# Allegro board CIRCLELED.brd
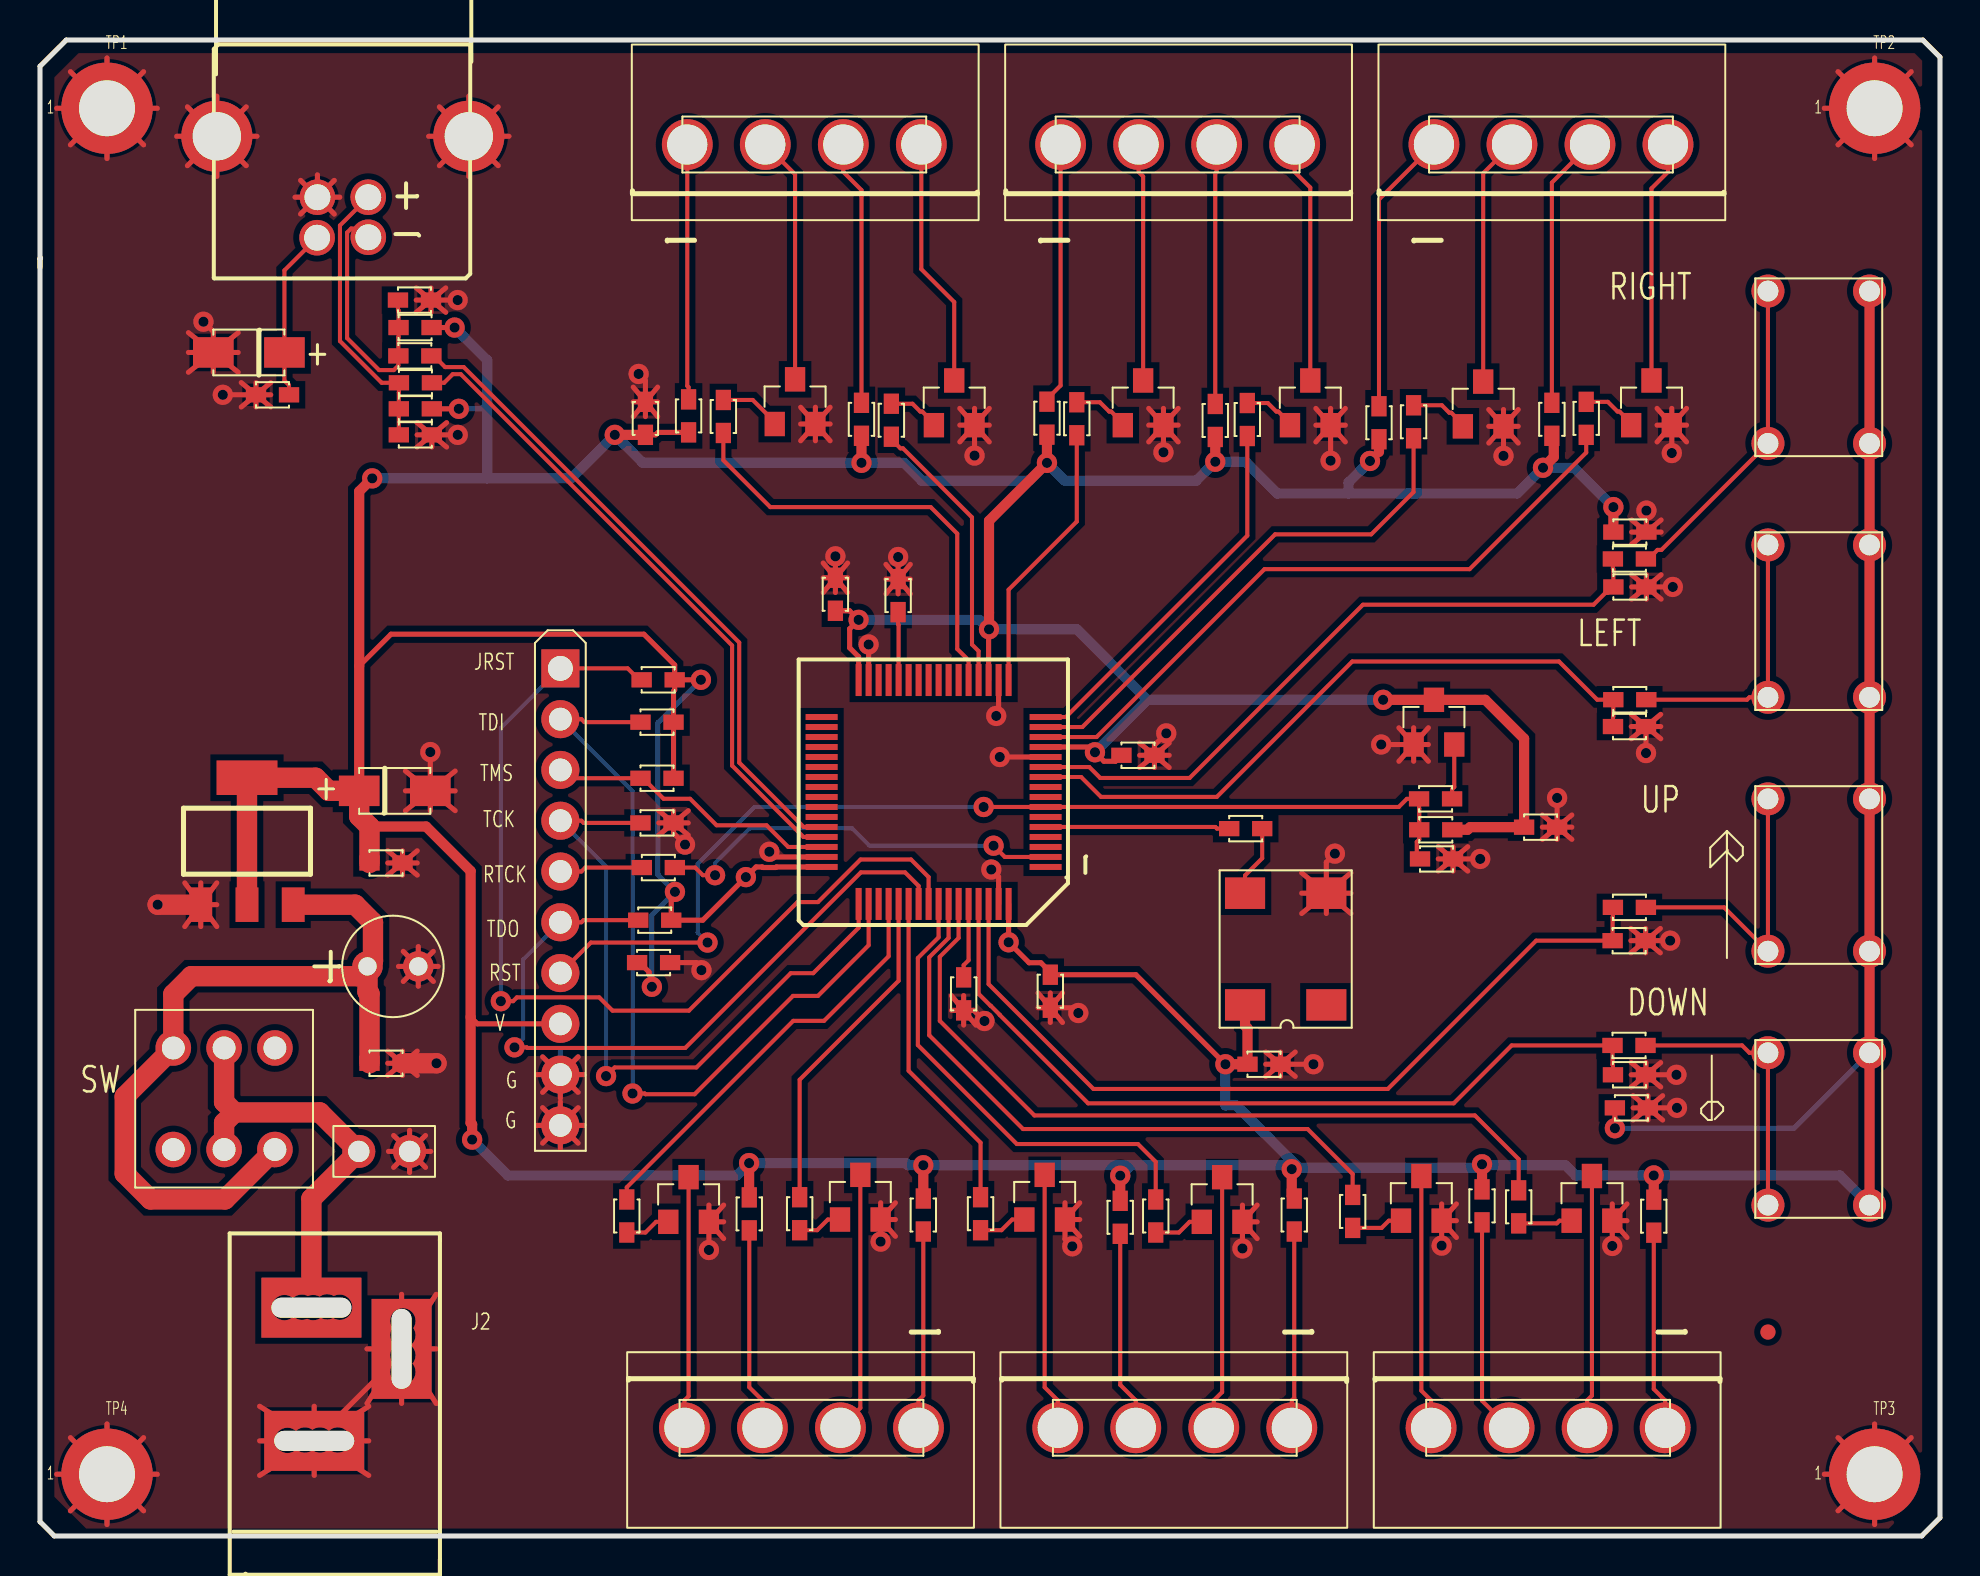
[diagram p0: board, top side]
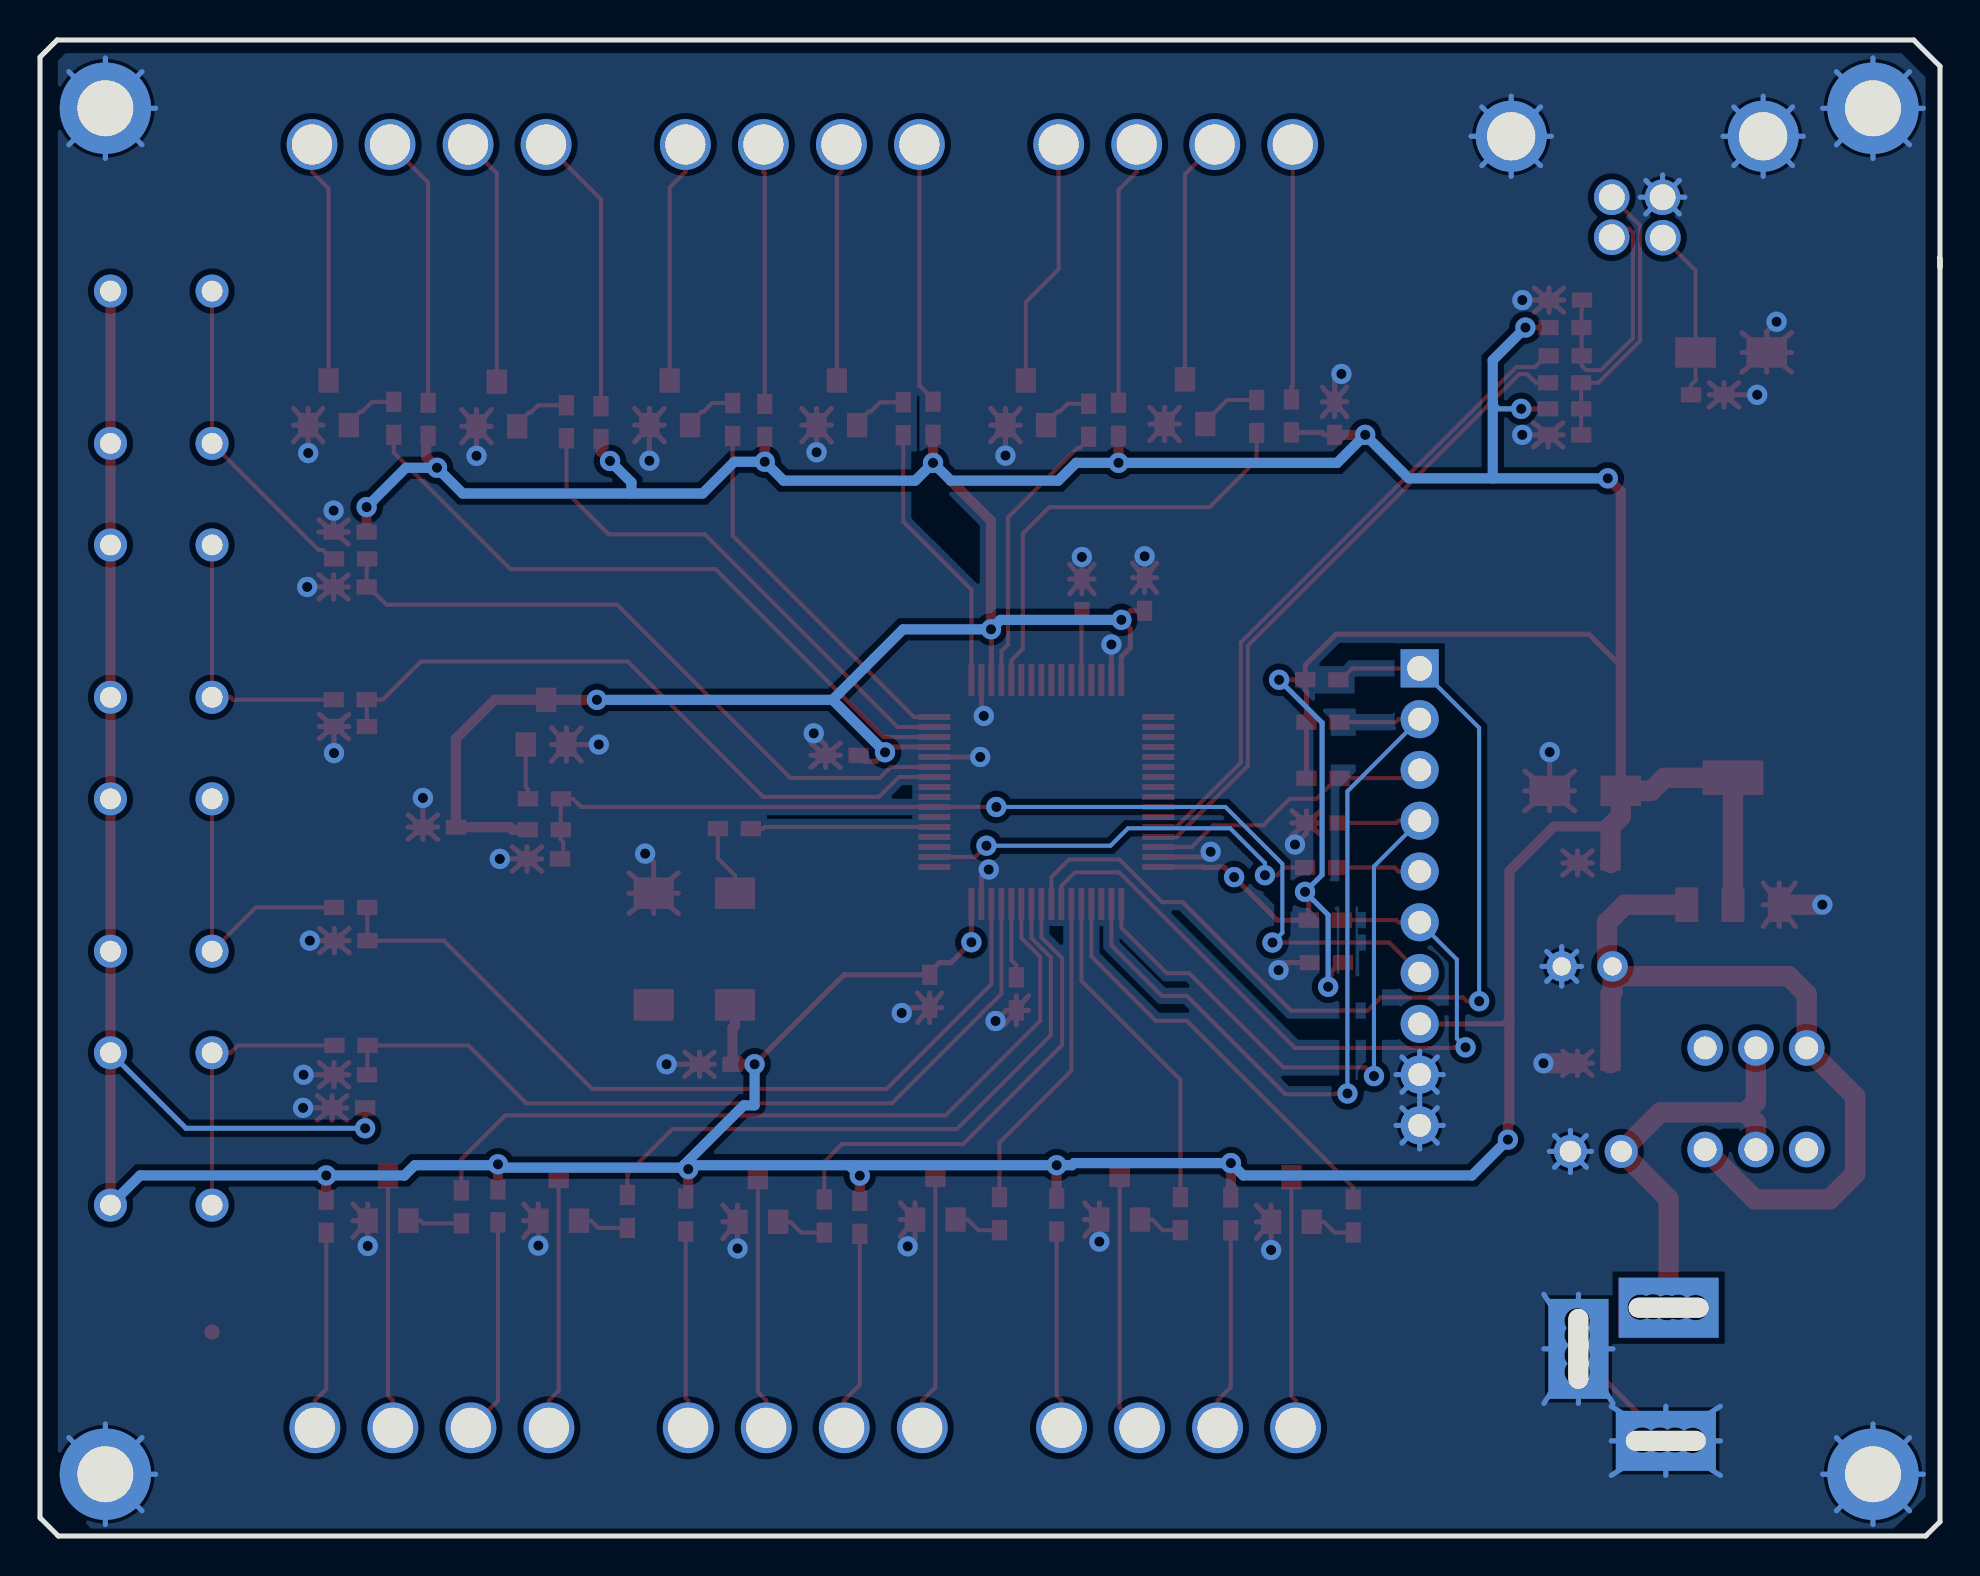
[diagram p1: board, bottom side, seen from below]

Outline 95.01 x 74.83 mm; copper layers: TOP, BOTTOM. Coordinates in mm from the lower left corner of the outline.
Outline path: 0.03,63.92 0,63.9 0,0.72 0.72,0 94.1,0 95.01,0.92 95.01,73.97 94.15,74.83 1.32,74.83 0,73.51 0,63.44

## Design rules (mm)
nets with their own width: min track width 0.254; nets GND VCC3_3

## Placement (name value [footprint] x y rotation side)
C1  47uF/25V  [CAP2]  14.19 27.31 270 top
C2  0.1uF  [0603]  16.48 23.65 0 top
C3  22uF  [CT1206]  15.96 37.27 0 top
C4  0.1uF  [0603]  16.48 33.67 0 top
C5  0.1uF  [0603]  74.21 35.46 0 top
C6  22uF/16v  [CT1206]  12.22 59.2 180 top
C7  100n  [0603]  69.01 33.87 0 top
C8  0.1uF  [0603]  12.45 57.08 180 top
C9  0.1uF  [0603]  50.52 28.08 270 top
C10  0.1uF  [0603]  60.38 23.6 0 top
C11  0.1uF  [0603]  39.78 46.28 90 top
C12  0.1uF  [0603]  54.08 39.05 0 top
C13  0.1uF  [0603]  30.28 55.08 90 top
C14  0.1uF  [0603]  78.68 50.22 0 top
C15  0.1uF  [0603]  78.76 21.42 0 top
C16  0.1uF  [0603]  29.86 28.68 0 top
D1  12V  [CAPCK05]  18.48 19.24 90 top
D2  NC/ESD  [0603]  19.6 55.08 180 top
D3  NC/ESD  [0603]  19.55 61.82 180 top
J1  CON10  [SIP-10]  26.02 43.4 0 top
J2  PWR/12v@1.0A  [POWER]  14.34 10.42 180 top
J3  PWRKEY  [POWERKEY]  9.21 21.87 90 top
J4  KEY  [KEY4]  88.95 45.76 180 top
J5  KEY  [KEY4]  88.95 33.06 180 top
J6  KEY  [KEY4]  88.95 20.36 180 top
J7  KEY  [KEY4]  88.95 58.46 180 top
J8  CON6  [USB_B]  15.14 66.01 0 top
J9  CON4  [PWCON_4]  38.15 69.89 90 top
J10  CON4  [PWCON_4]  56.82 69.89 90 top
J11  CON4  [PWCON_4]  75.49 69.89 90 top
J12  CON4  [PWCON_4]  38.15 5.12 270 top
J13  CON4  [PWCON_4]  56.82 5.12 270 top
J14  CON4  [PWCON_4]  75.49 5.12 270 top
LR1  HOLE  [PCIR]  86.41 10.2 0 top
Q1  S9014LTI  [SOT-23]  37.76 56.74 0 top
Q2  S9014LTI  [SOT-23]  55.16 56.68 0 top
Q3  S9014LTI  [SOT-23]  45.72 56.68 0 top
Q4  S9014LTI  [SOT-23]  63.52 56.68 0 top
Q5  S9014LTI  [SOT-23]  72.17 56.62 0 top
Q6  S9014LTI  [SOT-23]  41.02 16.95 0 top
Q7  S9014LTI  [SOT-23]  32.43 16.83 0 top
Q8  S9014LTI  [SOT-23]  80.59 56.68 0 top
Q9  S9014LTI  [SOT-23]  59.11 16.83 0 top
Q10  S9014LTI  [SOT-23]  77.61 16.89 0 top
Q11  S9014LTI  [SOT-23]  50.24 16.95 0 top
Q12  S9014LTI  [SOT-23]  69.08 16.89 0 top
R1  10k  [0603]  30.09 42.83 0 top
R2  10k  [0603]  30.03 37.9 0 top
R3  10k  [0603]  30.03 35.67 0 top
R4  10k  [0603]  30.03 40.71 0 top
R5  10k  [0603]  29.92 30.8 0 top
R6  0  [0603]  46.19 27.94 270 top
R7  NC  [0603]  42.91 47.86 270 top
R8  100  [0603]  80.33 41.83 180 top
R9  100  [0603]  80.31 31.44 180 top
R10  1K  [0603]  78.64 29.78 0 top
R11  1K  [0603]  78.66 40.49 0 top
R12  0  [0603]  31.75 33.44 180 top
R13  100  [0603]  80.31 48.87 180 top
R14  100  [0603]  80.29 24.54 180 top
R15  1K  [0603]  78.66 23.07 0 top
R16  1K  [0603]  78.68 47.47 0 top
R17  1.5K  [0603]  19.6 56.38 180 top
R18  1.5K  [0603]  19.58 60.45 180 top
R19  10k  [0603]  70.62 35.33 180 top
R20  5.1  [0603]  17.92 59.03 0 top
R21  10  [0603]  61.12 35.38 180 top
R22  5.1  [0603]  17.95 57.68 0 top
R23  10  [0603]  68.96 36.87 0 top
R24  100  [0603]  32.43 56.85 270 top
R25  100  [0603]  34.17 55.17 90 top
R26  100  [0603]  50.36 56.74 270 top
R27  100  [0603]  41.08 56.68 270 top
R28  100  [0603]  51.85 55.06 90 top
R29  100  [0603]  58.77 56.62 270 top
R30  100  [0603]  42.58 54.98 90 top
R31  100  [0603]  60.37 55.02 90 top
R32  100  [0603]  68.69 54.91 90 top
R33  100  [0603]  66.96 56.51 270 top
R34  100  [0603]  37.99 16.95 270 top
R35  100  [0603]  44.17 15.23 90 top
R36  100  [0603]  75.6 56.68 270 top
R37  100  [0603]  35.47 15.29 90 top
R38  100  [0603]  29.34 16.83 270 top
R39  100  [0603]  77.32 55.08 90 top
R40  100  [0603]  55.79 16.83 270 top
R41  100  [0603]  73.94 17.29 270 top
R42  100  [0603]  62.72 15.23 90 top
R43  100  [0603]  54.02 15.12 90 top
R44  100  [0603]  80.7 15.17 90 top
R45  100  [0603]  72.11 15.69 90 top
R46  100  [0603]  47.03 16.95 270 top
R47  100  [0603]  65.64 17.06 270 top
TP1  via  [VIA_2_5MM]  3.35 71.42 0 top
TP2  via  [VIA_2_5MM]  91.74 71.42 0 top
TP3  via  [VIA_2_5MM]  91.74 3.09 0 top
TP4  via  [VIA_2_5MM]  3.35 3.09 0 top
U1  STM32F103RFT  [LQFP64Z]  44.69 37.22 180 top
U2  AMS1117-3.3  [SOT223]  10.35 34.75 0 top
U3  MAX809_EUR-T  [SOT-23]  69.71 40.71 0 top
Y1  11.0592MHz  [OSC_SMD]  64.32 26.57 90 top

## Library data of the parts
C1 = CAPACITOR POL: User Part Number: ***; Tolerance: ***
C2 C4 C5 C7-C16 = CAP NP
C3 = CAPACITOR POL
C6 = CAP POL
D1 = DIODE BI-DIR TRIG: Tolerance: ***; User Part Number: ***
D2 D3 = BAV99_0
J1 = CON10: User Part Number: ***
J2 = HEADER 3_1
J3 = HEADER 6
J4-J7 = HEADER 4
J8 = CON6
J9-J14 = CON4
LR1 = HOLE
Q1-Q12 = 1R1001_0
R1-R47 = R
TP1-TP4 = via
U1 = STM32F107_1
U2 = LM117HV/TO3_3
U3 = MAX809_EUR-T
Y1 = Osc

## Footprints (pads in the part's own frame, mm; a bottom-side part is the same pattern mirrored in y, then rotated)
0603
  rect 1.016x0.762 smd: 1(0,0) 2(1.651,0)
CAP2
  round 1.524 hole 0.914: 1(-1.181,2.19) 2(-1.181,4.73)
CAPCK05
  round 1.651 hole 1.067: 1(0,0) 2(0,2.54)
CT1206
  rect 2.032x1.524 smd: 1(0,0) 2(3.556,0)
KEY4
  round 1.651 hole 1.041: 1(-2.54,3.81) 2(-2.54,-3.81) 3(2.54,-3.81) 4(2.54,3.81)
LQFP64Z
  rect 1.6x0.3 smd: 1(-5.6,3.75) 2(-5.6,3.25) 3(-5.6,2.75) 4(-5.6,2.25) 5(-5.6,1.75) 6(-5.6,1.25) 7(-5.6,0.75) 8(-5.6,0.25) 9(-5.6,-0.25) 10(-5.6,-0.75) 11(-5.6,-1.25) 12(-5.6,-1.75) 13(-5.6,-2.25) 14(-5.6,-2.75) 15(-5.6,-3.25) 16(-5.6,-3.75) 33(5.6,-3.75) 34(5.6,-3.25) 35(5.6,-2.75) 36(5.6,-2.25) 37(5.6,-1.75) 38(5.6,-1.25) 39(5.6,-0.75) 40(5.6,-0.25) 41(5.6,0.25) 42(5.6,0.75) 43(5.6,1.25) 44(5.6,1.75) 45(5.6,2.25) 46(5.6,2.75) 47(5.6,3.25) 48(5.6,3.75)
  rect 0.3x1.6 smd: 17(-3.75,-5.6) 18(-3.25,-5.6) 19(-2.75,-5.6) 20(-2.25,-5.6) 21(-1.75,-5.6) 22(-1.25,-5.6) 23(-0.75,-5.6) 24(-0.25,-5.6) 25(0.25,-5.6) 26(0.75,-5.6) 27(1.25,-5.6) 28(1.75,-5.6) 29(2.25,-5.6) 30(2.75,-5.6) 31(3.25,-5.6) 32(3.75,-5.6) 49(3.75,5.6) 50(3.25,5.6) 51(2.75,5.6) 52(2.25,5.6) 53(1.75,5.6) 54(1.25,5.6) 55(0.75,5.6) 56(0.25,5.6) 57(-0.25,5.6) 58(-0.75,5.6) 59(-1.25,5.6) 60(-1.75,5.6) 61(-2.25,5.6) 62(-2.75,5.6) 63(-3.25,5.6) 64(-3.75,5.6)
OSC_SMD
  rect 1.575x2.007 smd: 1(0,0) 7(5.588,0) 8(5.588,4.064) 14(0,4.064)
PCIR
  round 0.762 smd: 1(0,0)
POWER
  rect 5x3 hole 4x1: 1(0.77,-1) 2(0.63,5.66)
  rect 3x5 hole 1x4: 3(-3.74,1.06)
POWERKEY
  round 1.778 hole 1.143: 1(-2.54,2.54) 2(-2.54,0) 3(-2.54,-2.54) 4(2.54,-2.54) 5(2.54,0) 6(2.54,2.54)
PWCON_4
  round 2.54 hole 2.007: 1(-0.29,5.781) 2(-0.29,1.88) 3(-0.29,-2.022) 4(-0.29,-5.923)
SIP-10
  rect 1.905x1.905 hole 1.245: 1(0,0)
  round 1.905 hole 1.143: 2(0,-2.54) 3(0,-5.08) 4(0,-7.62) 5(0,-10.16) 6(0,-12.7) 7(0,-15.24) 8(0,-17.78) 9(0,-20.32) 10(0,-22.86)
SOT223
  rect 1.143x1.727 smd: 1(-2.311,-3.175) 2(0,-3.175) 3(2.311,-3.175)
  rect 3.048x1.727 smd: 4(0,3.175)
SOT-23
  rect 1.016x1.219 smd: 1(-1.016,-1.118) 2(1.016,-1.118) 3(0,1.118)
USB_B
  round 1.778 hole 1.295: 1(-1.286,-1.074) 2(1.274,-1.051) 3(1.27,0.952) 4(-1.27,0.952)
  round 3.556 hole 2.413: 5(-6.3,4) 6(6.3,4)
VIA_2_5MM
  round 4.572 hole 2.794: 1(0,0)

## Nets
GND: C1.2 C2.2 C3.2 C4.2 C5.2 C6.2 C7.2 C8.2 C9.2 C10.2 C11.2 C12.2 C13.2 C14.2 C15.2 C16.2 D1.1 D2.1 D3.1 J1.9 J1.10 J2.2 J2.3 J8.4 J8.5 J8.6 Q1.2(E) Q2.2(E) Q3.2(E) Q4.2(E) Q5.2(E) Q6.2(E) Q7.2(E) Q8.2(E) Q9.2(E) Q10.2(E) Q11.2(E) Q12.2(E) R3.2 R6.2 R7.1 R10.2 R11.2 R15.2 R16.2 TP1.1(VIA) TP2.1(VIA) TP3.1(VIA) TP4.1(VIA) U1.12(VSSA) U1.18(VSS4) U1.31(VSS1) U1.47(VSS2) U1.63(VSS3) U2.1(ADJ) U3.1(GND) Y1.7(GND)
VCC3_3: C3.1 C4.1 C5.1 C9.1 C10.1 C11.1 C12.1 C13.1 C14.1 C15.1 C16.1 J1.8 J4.1 J4.2 J5.1 J5.2 J6.1 J6.2 J7.1 J7.2 R1.2 R2.2 R4.2 R5.2 R17.1 R18.1 R19.1 R24.2 R26.2 R27.2 R29.2 R33.2 R35.2 R36.2 R37.2 R42.2 R43.2 R44.2 R45.2 U1.13(VDDA) U1.19(VDD4) U1.32(VDD1) U1.48(VDD2) U1.64(VDD3) U2.2(VOUT) U2.4(NC) U3.3(VCC) Y1.14(VCC)
VCC12V: D1.2 J2.1 J3.2 J3.5
VCC_VBUS: C6.1 C8.1 J8.1
VCCIN: C1.1 C2.1 J3.3 J3.6 U2.3(VIN)
ARM_RST_N: C7.1 J1.7 R19.2 R23.1 U1.7(NRST)
ARMCLKIN: R21.2 U1.5(OSC_IN/PD0)
D0: R25.1 U1.21(PA5/SPI1_SCK)
D1: R30.1 U1.20(PA4/SPI1_MSS)
D2: R28.1 U1.17(PA3/RX2)
D3: R31.1 U1.16(PA2/TX2)
D4: R32.1 U1.15(PA1)
D5: R39.1 U1.14(PA0-WKUP)
D6: R34.1 U1.53(PC12/TX5)
D7: R38.1 U1.52(PC11/RX4)
D8: R41.1 U1.59(PB7/SDA1)
D9: R47.1 U1.58(PB6/SCL1)
D10: R40.1 U1.57(PB5)
D11: R46.1 U1.54(PD2/RX5)
DOWN: R14.2 R15.1 U1.61(PB8)
DQ0: J9.2 Q1.3(C)
DQ1: J9.4 Q3.3(C)
DQ2: J10.2 Q2.3(C)
DQ3: J10.4 Q4.3(C)
DQ4: J11.2 Q5.3(C)
DQ5: J11.4 Q8.3(C)
DQ6: J12.2 Q6.3(C)
DQ7: J12.4 Q7.3(C)
DQ8: J14.2 Q10.3(C)
DQ9: J14.4 Q12.3(C)
DQ10: J13.2 Q9.3(C)
DQ11: J13.4 Q11.3(C)
JTAG_RST: J1.1 R1.1 U1.56(PB4/JTRSTN)
LEFT: R8.2 R11.1 U1.10(PC2)
RIGHT: R13.2 R16.1 U1.11(PC3)
RTCK: J1.5 R12.2
TCLK: J1.4 R3.1 U1.49(PA14/JTCK)
TDI: J1.2 R4.1 U1.50(PA15/JTDI)
TDO: J1.6 R5.1 U1.55(PB3/JTDO)
TMS: J1.3 R2.1 U1.46(PA13/JTMS)
UP: R9.2 R10.1 U1.62(PB9)
USB+: R22.2 U1.45(PA12/USB+)
USB-: R20.2 U1.44(PA11/USB-)
N01892: R7.2 U1.28(PB2/BOOT1)
N01962: R6.1 U1.60(BOOT0)
N02254: R21.1 Y1.8(OUT)
N03112: D3.2 J8.2 R18.2 R20.1
N03116: D2.2 J8.3 R17.2 R22.1
N07244: J9.1 R24.1
N07286: J9.3 R27.1
N09335: J10.1 R26.1
N09345: J10.3 R29.1
N10158: J11.1 R33.1
N10168: J11.3 R36.1
N10591: J12.1 R35.1
N10601: J12.3 R37.1
N10711: J14.1 R44.1
N10721: J14.3 R45.1
N10838: J13.1 R42.1
N10848: J13.3 R43.1
N15526: J5.3 J5.4 R9.1
N15732: J6.3 J6.4 R14.1
N16389: J4.3 J4.4 R8.1
N16471: J7.3 J7.4 R13.1
N018780: R12.1 U1.2(PC13/RTC)
N021801: R23.2 U3.2(/RST)
N069480: Q1.1(B) R25.2
N074280: Q3.1(B) R30.2
N092570: Q2.1(B) R28.2
N093950: Q4.1(B) R31.2
N095300: Q5.1(B) R32.2
N095980: Q8.1(B) R39.2
N097490: Q6.1(B) R34.2
N099610: Q7.1(B) R38.2
N100350: Q10.1(B) R41.2
N103300: Q12.1(B) R47.2
N104020: Q9.1(B) R40.2
N104740: Q11.1(B) R46.2

Pads without a net: J3 1 4; LR1 1; U1 1 3 4 6 8 9 22 23 24 25 26 27 29 30 33 34 35 36 37 38 39 40 41 42 43 51; Y1 1

## Via types
v1: diameter 1.016, hole 0.508, TOP to BOTTOM, 78 vias
v2: diameter 1.78, hole 1.27, TOP to BOTTOM, 13 vias

## Routing (per net, layer and track width the routed paths; a pad name or vN(x,y) marks a point on that pad's centre or on a via; arc(x,y) is an arc through that point)
GND: length 683.6
  TOP w0.254: 42.91,47.13 R7.1 ; R7.1 43.52,47.86 ; R7.1 42.3,47.86 ; R7.1 v1(42.91,48.97) ; R7.1 42.3,47.13 ; R7.1 43.52,48.6 ; R7.1 42.3,48.6 ; R7.1 43.52,47.13 ; 72.45,55.51 Q5.2 ; Q5.2 72.45,54.67 ; Q5.2 72.45,56.35 ; Q5.2 73.19,56.35 ; Q5.2 73.92,56.35 ; Q5.2 73.92,54.67 ; Q5.2 73.92,55.51 ; Q5.2 v1(73.19,54.03) ; Q4.2 65.28,55.56 ; Q4.2 65.28,54.73 ; Q4.2 63.8,54.73 ; Q4.2 63.8,55.56 ; Q4.2 63.8,56.4 ; Q4.2 65.28,56.4 ; Q4.2 64.54,56.4 ; Q4.2 v1(64.54,53.79) ; 18.27,36.28 C3.2 ; C3.2 18.27,37.27 ; C3.2 20.76,36.28 ; C3.2 19.52,36.28 ; C3.2 v1(19.52,39.21) ; C3.2 20.76,38.26 ; C3.2 18.27,38.26 ; C3.2 20.76,37.27 ; 17.39,33.67 C4.2 ; C4.2 18.13,34.28 ; C4.2 17.39,33.06 ; C4.2 18.87,33.67 ; C4.2 17.39,34.28 ; C4.2 18.87,34.28 ; C4.2 18.13,33.06 ; C4.2 18.87,33.06 ; C8.2 v1(9.14,57.08) ; C8.2 11.54,57.69 ; C8.2 11.54,56.47 ; C8.2 10.8,56.47 ; C8.2 11.54,57.08 ; C8.2 10.8,57.69 ; C8.2 10.07,56.47 ; C8.2 10.07,57.69 ; Y1.7 65.56,32.15 ; Y1.7 65.56,31.14 ; Y1.7 64.32,33.7 v1(64.75,34.13) ; Y1.7 63.09,31.14 ; Y1.7 63.09,33.17 ; Y1.7 63.09,32.15 ; Y1.7 64.32,31.14 ; Y1.7 65.56,33.17 ; C14.2 81.07,50.83 ; C14.2 v1(80.33,51.29) ; C14.2 81.07,50.22 ; C14.2 79.59,49.61 ; C14.2 79.59,50.22 ; C14.2 79.59,50.83 ; 79.56,29.78 R10.2 ; R10.2 80.29,29.17 ; R10.2 80.29,30.39 ; R10.2 79.56,29.17 ; R10.2 81.03,29.17 ; R10.2 79.56,30.39 ; R10.2 81.03,30.39 ; R10.2 v1(81.52,29.78) ; v2(18.15,10.04) 18.15,9.42 J2.3 ; Q3.2 47.47,56.4 ; Q3.2 46,54.73 ; Q3.2 46,56.4 ; Q3.2 46.73,56.4 ; Q3.2 47.47,54.73 ; Q3.2 v1(46.73,54.04) ; Q3.2 47.47,55.56 ; Q3.2 46,55.56 ; Q7.2 34.19,16.55 ; Q7.2 34.19,15.72 ; Q7.2 34.19,14.88 ; Q7.2 33.45,16.55 ; Q7.2 v1(33.45,14.31) ; 61.3,22.99 C10.2 ; C10.2 62.03,24.21 ; C10.2 62.77,22.99 ; C10.2 61.3,23.6 ; C10.2 61.3,24.21 ; C10.2 62.77,24.21 ; C10.2 v1(63.68,23.6) ; C10.2 62.03,22.99 ; 19.6,54.47 D2.1 ; D2.1 20.33,54.47 ; D2.1 v1(20.89,55.08) ; D2.1 20.33,55.69 ; D2.1 18.86,55.08 ; D2.1 18.86,55.69 ; D2.1 18.86,54.47 ; R15.2 80.31,23.68 ; R15.2 v1(81.83,23.07) ; R15.2 79.57,22.46 ; R15.2 79.57,23.68 ; R15.2 80.31,22.46 ; R15.2 81.05,23.68 ; R15.2 81.05,22.46 ; R15.2 79.57,23.07 ; 79.57,41.1 R11.2 ; R11.2 79.57,40.49 ; R11.2 79.57,39.88 ; R11.2 v1(80.31,39.16) ; R11.2 81.05,41.1 ; R11.2 81.05,39.88 ; R11.2 81.05,40.49 ; Q2.2 56.18,56.4 ; Q2.2 56.92,54.73 ; Q2.2 56.92,56.4 ; Q2.2 55.44,54.73 ; Q2.2 55.44,56.4 ; Q2.2 55.44,55.56 ; Q2.2 56.92,55.56 ; Q2.2 v1(56.18,54.21) ; J8.5 8.84,72.02 ; J8.5 10.31,68.54 ; J8.5 10.85,70.01 ; J8.5 10.31,71.48 ; J8.5 6.84,70.01 ; J8.5 7.37,68.54 ; J8.5 8.84,68.01 ; J8.5 7.37,71.48 ; C5.2 76.6,35.46 ; C5.2 76.6,34.85 ; C5.2 v1(75.87,36.92) ; C5.2 75.13,36.07 ; C5.2 75.13,35.46 ; C5.2 75.87,34.85 ; C5.2 75.13,34.85 ; C5.2 76.6,36.07 ; 19.44,70.01 J8.6 ; J8.6 21.44,72.02 ; J8.6 23.45,70.01 ; J8.6 22.91,68.54 ; J8.6 19.97,68.54 ; J8.6 22.91,71.48 ; J8.6 21.44,68.01 ; J8.6 19.97,71.48 ; 14.85,4.76 v2(14.89,4.8) v2(14,4.8) 13.75,4.8 ; 14.85,4.76 16.44,4.76 ; 14.85,4.76 J2.2 ; U3.1 68.69,40.43 ; U3.1 67.95,40.43 ; U3.1 68.69,38.75 ; U3.1 v1(67.07,39.59) ; U3.1 67.95,38.75 ; U3.1 69.43,38.75 ; U3.1 69.43,39.59 ; U3.1 69.43,40.43 ; v2(13.25,4.8) 13.67,4.8 13.69,4.78 ; 7.42,58.21 C6.2 ; C6.2 9.91,58.21 ; C6.2 7.42,59.2 ; C6.2 9.91,59.2 ; C6.2 8.67,60.24 v1(8.17,60.74) ; C6.2 9.91,60.19 ; C6.2 8.67,58.21 ; C6.2 7.42,60.19 ; 24.84,20.54 J1.10 ; J1.10 26.91,21.42 ; J1.10 26.02,21.72 ; J1.10 27.2,20.54 ; J1.10 25.14,19.65 ; J1.10 26.02,19.36 ; J1.10 25.14,21.42 ; J1.10 26.91,19.65 ; 45.58,27.03 R6.2 ; R6.2 46.7,26.29 v1(47.23,25.76) ; R6.2 46.19,25.56 ; R6.2 46.19,27.03 ; R6.2 45.58,26.29 ; R6.2 46.8,25.56 ; R3.2 32.42,35.06 ; R3.2 31.68,36.28 ; R3.2 32.42,35.67 ; R3.2 30.94,35.67 ; R3.2 30.94,36.28 ; R3.2 32.42,36.28 ; R3.2 31.68,35.16 v1(32.26,34.59) ; R3.2 30.94,35.06 ; C13.2 30.89,56.73 ; C13.2 30.89,57.47 ; C13.2 29.67,55.99 ; C13.2 30.28,57.79 v1(29.94,58.13) ; C13.2 30.28,55.99 ; C13.2 29.67,57.47 ; C13.2 30.89,55.99 ; C13.2 29.67,56.73 ; C9.2 50.52,27.16 ; C9.2 51.66,26.43 v1(51.92,26.16) ; C9.2 49.91,26.43 ; C9.2 50.52,25.69 ; C9.2 51.13,25.69 ; C9.2 51.13,27.16 ; C9.2 49.91,27.16 ; 18.08,9.13 13.75,4.8 ; 18.08,9.13 18.08,9.1 ; 18.08,9.13 J2.3 ; 13.75,4.8 J2.2 ; U1.31 v1(41.44,44.59) ; 17.39,23.04 C2.2 ; C2.2 18.87,24.26 ; C2.2 18.13,23.04 ; C2.2 18.13,24.26 ; C2.2 17.39,23.65 ; C2.2 18.87,23.04 ; C2.2 17.39,24.26 ; Q12.2 70.83,14.93 ; Q12.2 70.83,15.77 ; Q12.2 v1(70.09,14.52) ; Q12.2 70.83,16.61 ; Q12.2 70.09,16.61 ; 25.14,22.19 J1.9 ; J1.9 26.91,22.19 ; J1.9 27.2,23.08 ; J1.9 26.91,23.96 ; J1.9 26.02,21.9 ; J1.9 24.84,23.08 ; J1.9 25.14,23.96 ; C7.2 70.66,34.48 ; C7.2 v1(72.02,33.87) ; C7.2 69.93,33.26 ; C7.2 69.93,34.48 ; C7.2 71.4,34.48 ; C7.2 70.66,33.26 ; C7.2 71.4,33.26 ; C7.2 69.93,33.87 ; Q10.2 79.36,16.61 ; Q10.2 79.36,14.93 ; Q10.2 79.36,15.77 ; Q10.2 78.62,16.61 ; Q10.2 v1(78.62,14.51) ; Q11.2 51.99,16.67 ; Q11.2 51.26,14.85 v1(51.62,14.49) ; Q11.2 51.26,16.67 ; Q11.2 51.99,15.83 ; Q11.2 51.99,14.99 ; 89.23,3.09 TP3.1 ; TP3.1 89.91,1.26 ; TP3.1 93.57,4.92 ; TP3.1 91.74,5.6 ; TP3.1 89.91,4.92 ; TP3.1 91.74,0.58 ; 18.08,9.1 18.08,8.27 ; 18.08,9.1 v2(18.15,9.04) ; C1.2 18.92,29.48 ; C1.2 17.93,28.49 ; C1.2 18.92,27.5 ; C1.2 18.17,27.74 ; C1.2 19.67,29.24 ; C1.2 19.91,28.49 ; C1.2 18.17,29.24 ; C1.2 19.67,27.74 ; D3.1 20.29,62.43 ; D3.1 18.82,62.43 ; D3.1 20.29,61.21 ; D3.1 v1(20.89,61.82) ; D3.1 19.55,61.21 ; D3.1 18.82,61.82 ; D3.1 19.55,62.43 ; D3.1 18.82,61.21 ; 17.69,18.44 D1.1 ; D1.1 18.48,18.18 ; D1.1 19.54,19.24 ; D1.1 19.28,18.44 ; D1.1 17.69,20.03 ; D1.1 17.43,19.24 ; D1.1 19.28,20.03 ; D1.1 18.48,20.29 ; J8.4 14.71,66.13 ; J8.4 14.71,67.81 ; J8.4 13.03,66.13 ; J8.4 12.76,66.97 ; J8.4 13.87,68.08 ; J8.4 14.99,66.97 ; J8.4 13.03,67.81 ; Q9.2 v1(60.13,14.38) ; Q9.2 60.87,15.72 ; Q9.2 60.87,14.88 ; Q9.2 60.13,16.55 ; Q9.2 60.87,16.55 ; v2(12.38,4.78) 13.69,4.78 ; 13.69,4.78 J2.2 ; 80.86,56.4 Q8.2 ; Q8.2 81.6,56.4 ; Q8.2 82.34,56.4 ; Q8.2 v1(81.6,54.17) ; Q8.2 82.34,54.73 ; Q8.2 80.86,55.56 ; Q8.2 80.86,54.73 ; Q8.2 82.34,55.56 ; C12.2 55.73,39.56 v1(56.32,40.15) ; C12.2 56.47,39.05 ; C12.2 56.47,39.66 ; C12.2 54.99,39.05 ; C12.2 54.99,38.44 ; C12.2 55.73,38.44 ; C12.2 54.99,39.66 ; C12.2 56.47,38.44 ; 7.24,30.49 U2.1 ; U2.1 8.84,32.67 ; U2.1 8.84,31.58 ; U2.1 8.04,32.67 ; U2.1 7.24,32.67 ; U2.1 8.04,30.49 ; U2.1 8.84,30.49 ; 0.84,3.09 TP4.1 ; TP4.1 1.52,1.26 ; TP4.1 1.52,4.92 ; TP4.1 5.87,3.09 ; TP4.1 3.35,5.6 ; TP4.1 5.18,4.92 ; TP4.1 3.35,0.58 ; TP4.1 5.18,1.26 ; C15.2 81.14,22.02 ; C15.2 79.67,22.02 ; C15.2 79.67,21.42 ; C15.2 80.41,22.02 ; C15.2 80.41,20.81 ; C15.2 81.14,20.81 ; C15.2 v1(81.86,21.42) ; C15.2 79.67,20.81 ; J2.3 19.81,9.36 ; J2.3 19.81,12.09 ; J2.3 16.35,6.63 ; J2.3 19.81,6.63 ; J2.3 16.35,9.36 ; J2.3 18.08,10.7 ; 38.04,55.62 Q1.2 ; Q1.2 38.04,56.46 ; Q1.2 38.78,54.78 ; Q1.2 38.78,56.46 ; Q1.2 39.51,54.78 ; Q1.2 39.51,56.46 ; Q1.2 39.51,55.62 ; Q1.2 38.04,54.78 ; J2.2 16.44,3.03 ; J2.2 13.71,6.49 ; J2.2 10.98,4.76 ; J2.2 13.71,3.03 ; J2.2 16.44,6.49 ; J2.2 10.98,6.49 ; J2.2 10.98,3.03 ; 79.59,47.47 R16.2 ; R16.2 79.59,46.86 ; R16.2 v1(81.65,47.47) ; R16.2 80.33,46.86 ; R16.2 81.07,46.86 ; R16.2 79.59,48.08 ; R16.2 81.07,48.08 ; R16.2 80.33,48.08 ; C11.2 40.39,48.67 ; C11.2 v1(39.78,49.01) ; C11.2 40.39,47.93 ; C11.2 39.17,47.19 ; C11.2 40.39,47.19 ; C11.2 39.78,47.19 ; C11.2 39.17,48.67 ; C11.2 39.17,47.93 ; 18.08,8.27 v2(18.15,8.21) ; 18.08,8.27 18.08,6.63 ; U1.18 47.94,41.14 v1(47.82,41.02) ; TP2.1 93.57,69.59 ; TP2.1 91.74,73.93 ; TP2.1 89.91,73.24 ; TP2.1 89.23,71.42 ; TP2.1 93.57,73.24 ; TP2.1 91.74,68.9 ; TP2.1 89.91,69.59 ; U1.12 v1(48,38.97) ; Q6.2 42.04,16.67 ; Q6.2 42.78,15.83 ; Q6.2 v1(42.04,14.72) ; Q6.2 42.78,14.99 ; Q6.2 42.78,16.67 ; 18.08,10.7 v2(18.15,10.76) ; 18.08,10.7 18.08,12.09 ; v1(33.08,28.3) 33.08,28.43 32.82,28.68 C16.2 ; TP1.1 5.18,73.24 ; TP1.1 5.18,69.59 ; TP1.1 3.35,68.9 ; TP1.1 1.52,69.59 ; TP1.1 0.84,71.42 ; TP1.1 1.52,73.24 ; TP1.1 3.35,73.93 ; TP1.1 5.87,71.42 ; v1(36.47,34.23) 36.73,33.97 U1.47 ; U1.63 47.94,32.97 v1(47.57,33.34)
  TOP w1.016: U2.1 v1(5.88,31.58) ; C2.2 v1(19.83,23.65)
  BOTTOM w0.254: 1.52,69.59 TP1.1 ; TP1.1 3.35,68.9 ; TP1.1 0.84,71.42 ; TP1.1 5.18,69.59 ; TP1.1 1.52,73.24 ; TP1.1 5.87,71.42 ; TP1.1 5.18,73.24 ; TP1.1 3.35,73.93 ; J2.2 16.44,4.76 ; J2.2 13.71,6.49 ; J2.2 13.71,3.03 ; J2.2 10.98,6.49 ; J2.2 16.44,6.49 ; J2.2 10.98,3.03 ; J2.2 10.98,4.76 ; J2.2 16.44,3.03 ; TP4.1 3.35,5.6 ; TP4.1 1.52,4.92 ; TP4.1 0.84,3.09 ; TP4.1 3.35,0.58 ; TP4.1 5.18,4.92 ; TP4.1 1.52,1.26 ; TP4.1 5.18,1.26 ; TP4.1 5.87,3.09 ; J1.9 26.02,24.26 ; J1.9 25.14,23.96 ; J1.9 25.14,22.19 ; J1.9 26.91,23.96 ; J1.9 26.02,21.9 ; J1.9 27.2,23.08 ; J1.9 26.91,22.19 ; J1.9 24.84,23.08 ; J8.6 21.44,72.02 ; J8.6 22.91,71.48 ; J8.6 23.45,70.01 ; J8.6 19.44,70.01 ; J8.6 19.97,68.54 ; J8.6 21.44,68.01 ; J8.6 22.91,68.54 ; J8.6 19.97,71.48 ; 25.14,19.65 J1.10 ; J1.10 26.91,21.42 ; J1.10 26.91,19.65 ; J1.10 26.02,21.72 ; J1.10 24.84,20.54 ; J1.10 25.14,21.42 ; J1.10 26.02,19.36 ; J1.10 27.2,20.54 ; C1.2 18.92,29.48 ; C1.2 19.67,29.24 ; C1.2 19.67,27.74 ; C1.2 18.92,27.5 ; C1.2 18.17,27.74 ; C1.2 19.91,28.49 ; C1.2 18.17,29.24 ; C1.2 17.93,28.49 ; 89.91,69.59 TP2.1 ; TP2.1 93.57,69.59 ; TP2.1 89.91,73.24 ; TP2.1 89.23,71.42 ; TP2.1 91.74,73.93 ; TP2.1 93.57,73.24 ; TP2.1 91.74,68.9 ; D1.1 18.48,20.29 ; D1.1 19.28,18.44 ; D1.1 18.48,18.18 ; D1.1 19.28,20.03 ; D1.1 17.43,19.24 ; D1.1 17.69,20.03 ; D1.1 17.69,18.44 ; D1.1 19.54,19.24 ; TP3.1 91.74,5.6 ; TP3.1 89.23,3.09 ; TP3.1 93.57,4.92 ; TP3.1 89.91,1.26 ; TP3.1 89.91,4.92 ; TP3.1 91.74,0.58 ; J2.3 19.81,9.36 ; J2.3 16.35,6.63 ; J2.3 18.08,6.63 ; J2.3 16.35,9.36 ; J2.3 19.81,6.63 ; J2.3 19.81,12.09 ; J2.3 18.08,12.09 ; J8.4 13.87,68.08 ; J8.4 14.71,66.13 ; J8.4 12.76,66.97 ; J8.4 13.03,66.13 ; J8.4 13.03,67.81 ; J8.4 14.99,66.97 ; J8.4 14.71,67.81 ; J8.5 8.84,72.02 ; J8.5 10.31,71.48 ; J8.5 8.84,68.01 ; J8.5 7.37,71.48 ; J8.5 6.84,70.01 ; J8.5 10.31,68.54 ; J8.5 7.37,68.54 ; J8.5 10.85,70.01
VCC3_3: length 448.5
  TOP w0.254: R2.2 R4.2 31.68,42.26 31.74,42.32 R1.2 ; 47.46,50.78 47.44,50.76 47.44,46.2 ; J1.8 21.87,25.62 21.53,25.96 ; 47.44,46.2 U1.19 ; 47.44,46.2 47.46,46.18 ; C16.1 29.99,28.68 30.46,28.21 30.46,28.08 30.6,27.94 v1(30.6,27.47) ; v1(31.75,32.22) 31.57,32.03 R5.2 33.14,30.8 v1(35.3,32.96) 35.81,33.47 36.12,33.47 36.15,33.44 36.8,33.44 36.83,33.47 U1.48 ; U1.13 52.49,39.47 v1(52.76,39.2) 53.2,38.75 53.78,38.75 C12.1 ; R1.2 v1(33.05,42.83) ; R1.2 31.74,43.57 30.2,45.11 17.55,45.11 15.96,43.52 ; R17.1 v1(20.94,56.38) ; U1.32 40.94,43.98 40.49,44.43 40.49,45.38 v1(40.94,45.83) 40.48,46.28 C11.1 ; C13.1 30.78,55.08 30.91,55.2 R24.2 ; 66.96,54.22 v1(66.51,53.77) ; C15.1 v1(78.76,20.4) ; R18.1 v1(20.73,60.45) ; U1.64 v1(48.44,29.7) 49.46,28.67 50.05,28.67 50.52,28.2 C9.1 54.8,28.08 v1(59.28,23.6)
  TOP w0.508: R29.2 v1(58.77,53.73) ; Y1.14 60.26,25.52 60.38,25.4 C10.1 v1(59.28,23.6) ; v1(16.61,52.9) 15.96,52.25 C3.1 ; R35.2 v1(44.17,18.55) ; R26.2 v1(50.36,53.68) 47.46,50.78 v1(47.46,45.35) ; R37.2 35.46,16.95 v1(35.46,18.65) ; R27.2 v1(41.08,53.68) ; R42.2 62.6,17.01 v1(62.6,18.35) ; R36.2 75.7,54.94 75.7,53.97 v1(75.16,53.43) ; v1(21.61,19.83) 21.61,20.59 21.53,20.66 21.53,33.26 19.31,35.49 16.48,35.49 ; R19.1 71.39,35.33 71.52,35.46 C5.1 74.21,39.88 72.27,41.83 U3.3 v1(67.16,41.83) ; C14.1 v1(78.68,51.47) ; R43.2 v1(54.02,18.02) ; J6.1 J6.2 J5.1 J5.2 J4.1 J4.2 J7.1 J7.2 ; R33.2 66.96,54.22 ; R44.2 v1(80.7,18.03) ; R45.2 v1(72.11,18.59) ; C13.1 v1(28.74,55.08)
  TOP w1.016: C4.1 16.48,35.49 15.96,36 C3.1 14.44,37.27 13.78,37.93 U2.4 U2.2
  BOTTOM w0.254: v1(78.76,20.4) 87.71,20.4 J6.2 ; v1(33.05,42.83) 30.9,40.68 30.9,33.07 v1(31.75,32.22) 30.6,31.07 v1(30.6,27.47) ; v1(62.6,18.35) 62.72,18.22 62.72,18.21 ; 59.78,21.54 61.9,19.43 ; v1(20.94,56.38) 22.06,56.38 22.37,56.69 ; 66.61,41.83 v1(67.16,41.83)
  BOTTOM w0.508: 55.38,41.83 66.61,41.83 ; 55.38,41.83 v1(52.76,39.2) ; 55.38,41.83 51.85,45.35 v1(47.46,45.35) 46.99,45.83 v1(40.94,45.83) ; 65.43,52.15 61.88,52.15 60.29,53.73 v1(58.77,53.73) 57.83,52.79 51.24,52.79 v1(50.36,53.68) 49.47,52.79 44.09,52.79 43.2,53.68 v1(41.08,53.68) 30.14,53.68 v1(28.74,55.08) 26.57,52.9 22.37,52.9 ; 65.43,52.15 73.87,52.15 v1(75.16,53.43) 76.71,53.43 v1(78.68,51.47) ; 65.43,52.15 65.43,52.7 v1(66.51,53.77) ; v1(62.6,18.35) 62.58,18.35 62.39,18.55 ; 54.54,18.55 v1(54.02,18.02) 54.01,18.03 ; 54.54,18.55 v1(44.17,18.55) 43.41,18.55 43.3,18.65 v1(35.46,18.65) 34.84,18.03 23.4,18.03 v1(21.61,19.83) ; 54.54,18.55 62.39,18.55 ; 72.16,18.55 76.28,18.55 76.79,18.03 v1(80.7,18.03) 90.01,18.03 J6.1 ; 72.16,18.55 72.04,18.43 62.94,18.43 62.82,18.55 ; 72.16,18.55 v1(72.11,18.59) ; v1(20.73,60.45) 22.37,58.81 22.37,52.9 ; 62.39,18.55 62.82,18.55 ; 62.82,18.55 59.82,21.54 59.28,21.54 v1(59.28,23.6) ; 22.37,52.9 v1(16.61,52.9)
VCC12V: length 24.7
  TOP w0.203: 13.66,11.42 14.32,11.42 ; 13.66,11.42 J2.1 ; 13.66,11.42 v2(13.66,11.42) ; 14.32,11.42 14.96,11.42 v2(14.99,11.44) ; 14.32,11.42 v2(14.36,11.46) ; J2.1 13.57,11.42 v2(12.22,11.42) ; J2.1 13.12,11.42 v2(13.09,11.44)
  TOP w1.016: J3.5 9.21,21.71 9.73,21.19 ; 9.73,21.19 13.99,21.19 D1.2 13.57,16.87 J2.1 ; 9.73,21.19 9.21,20.67 J3.2
VCC_VBUS: length 8.6
  TOP w0.203: J8.1 12.22,63.31 C6.1 12.22,57.79 12.45,57.57 C8.1
VCCIN: length 40.9
  TOP w1.016: J3.3 9.25,16.84 5.53,16.84 4.24,18.12 4.24,21.98 J3.6 6.67,27.1 7.57,28 15.89,28 C1.1 ; C1.1 16.65,28.77 16.65,30.69 15.76,31.58 U2.3 ; C1.1 16.38,27.22 16.48,27.12 C2.1
ARM_RST_N: length 53
  TOP w0.203: J1.7 27.55,29.68 v1(33.38,29.68) ; v1(47.19,36.47) U1.7 67.95,36.47 68.35,36.87 R23.1 68.96,36.39 68.97,36.38 R19.2 68.97,34.84 68.85,34.72 68.85,33.72 68.99,33.87 C7.1
  BOTTOM w0.203: v1(33.38,29.68) 32.89,30.18 32.89,33.62 35.73,36.47 v1(47.19,36.47)
ARMCLKIN: length 9.2
  TOP w0.203: U1.5 58.78,35.47 58.86,35.38 R21.2
D0: length 22.1
  TOP w0.203: R25.1 34.17,53.81 36.52,51.46 44.54,51.46 45.87,50.14 45.87,44.37 46.44,43.8 U1.21
D1: length 14
  TOP w0.203: U1.20 46.94,44.26 46.61,44.59 46.61,50.95 43.15,54.4 43.03,54.4 42.58,54.86 R30.1
D2: length 13.7
  TOP w0.203: R28.1 51.85,50.75 48.44,47.34 U1.17
D3: length 18.8
  TOP w0.203: R31.1 60.37,50.04 51.3,40.97 U1.16
D4: length 26
  TOP w0.203: R32.1 68.69,52.22 66.57,50.1 61.76,50.1 52.13,40.47 U1.15
D5: length 33.8
  TOP w0.203: U1.14 52.84,39.97 61.23,48.36 71.49,48.36 77.32,54.19 R39.1
D6: length 16.7
  TOP w0.203: R34.1 37.99,22.82 42.94,27.77 U1.53
D7: length 21.1
  TOP w0.203: U1.52 42.44,29 39.21,25.77 37.67,25.77 29.34,17.44 R38.1
D8: length 39.6
  TOP w0.203: U1.59 45.94,29.91 45,28.97 45,25.77 49.73,21.04 71.75,21.04 73.94,18.85 R41.1
D9: length 32.1
  TOP w0.203: U1.58 45.44,29.92 44.47,28.95 44.47,25.05 49.16,20.36 63.39,20.36 65.64,18.1 R47.1
D10: length 23.7
  TOP w0.203: U1.57 44.94,29.95 43.9,28.91 43.9,24.56 48.85,19.61 54.9,19.61 55.79,18.72 R40.1
D11: length 16.2
  TOP w0.203: U1.54 43.44,23.27 47.03,19.67 R46.1
DOWN: length 41.1
  TOP w0.203: R15.1 78.66,23.55 78.64,23.57 R14.2 73.59,24.54 70.69,21.64 52.41,21.64 47.99,26.06 47.99,26.08 47.55,26.52 47.54,26.52 46.94,27.12 U1.61
DQ0: length 12.4
  TOP w0.203: Q1.3 37.76,68.11 J9.2
DQ1: length 12.5
  TOP w0.203: Q3.3 45.72,61.72 44.07,63.37 J9.4
DQ2: length 11.9
  TOP w0.203: J10.2 54.94,68.23 55.16,68 Q2.3
DQ3: length 12.1
  TOP w0.203: Q4.3 63.52,67.45 62.74,68.23 J10.4
DQ4: length 12.5
  TOP w0.203: J11.2 72.17,68.16 Q5.3
DQ5: length 12.1
  TOP w0.203: J11.4 81.41,68.23 80.59,67.41 Q8.3
DQ6: length 13.1
  TOP w0.203: J12.2 41.02,6.41 Q6.3
DQ7: length 12.6
  TOP w0.203: Q7.3 32.43,6.99 32.23,6.78 J12.4
DQ8: length 12.7
  TOP w0.203: J14.2 77.37,6.78 77.61,7.02 Q10.3
DQ9: length 12.8
  TOP w0.203: J14.4 69.56,6.78 69.08,7.27 Q12.3
DQ10: length 12.7
  TOP w0.203: J13.2 58.7,6.78 59.11,7.2 Q9.3
DQ11: length 12.9
  TOP w0.203: J13.4 50.9,6.78 50.24,7.44 Q11.3
JTAG_RST: length 48.8
  TOP w0.203: U1.56 44.44,32.96 43.56,33.84 41.03,33.84 38.9,31.71 37.88,31.71 32.45,26.28 28.63,26.28 27.97,26.94 23.85,26.94 23.66,26.75 v1(23.05,26.75) ; R1.1 29.96,42.83 29.39,43.4 J1.1
  BOTTOM w0.203: J1.1 23.05,40.42 v1(23.05,26.75)
LEFT: length 33.7
  TOP w0.203: R11.1 78.66,40.97 78.67,40.99 R8.2 77.87,41.83 75.96,43.74 65.62,43.74 58.85,36.97 53.06,36.97 52.06,37.97 U1.10
RIGHT: length 34.1
  TOP w0.203: 78.28,47.18 78.58,47.47 R16.1 78.68,48.37 78.66,48.39 R13.2 ; 78.28,47.18 77.69,46.58 66.15,46.58 57.49,37.92 53.02,37.92 52.47,38.47 U1.11 ; 78.28,47.18 78.41,47.18
RTCK: length 4.2
  TOP w0.203: J1.5 27.08,33.24 27.27,33.44 R12.2
TCLK: length 34.7
  TOP w0.203: R3.1 27.19,35.67 27.08,35.78 J1.4 ; U1.49 40.94,30.42 38.67,28.15 37.54,28.15 32.83,23.44 28.74,23.44 v1(28.31,23.01)
  BOTTOM w0.203: v1(28.31,23.01) 28.31,33.49 J1.4
TDI: length 41.3
  TOP w0.203: v1(29.63,22.13) 30.24,22.13 30.28,22.1 32.74,22.1 37.65,27.02 38.9,27.02 41.44,29.55 U1.50 ; J1.2 27.08,40.86 27.23,40.71 R4.1
  BOTTOM w0.203: v1(29.63,22.13) 29.63,37.25 J1.2
TDO: length 36.2
  TOP w0.203: R5.1 27.18,30.8 27.08,30.7 J1.6 ; U1.55 43.94,32.52 43.26,33.19 41.05,33.19 32.27,24.41 24.37,24.41 24.34,24.44 v1(23.73,24.44)
  BOTTOM w0.203: v1(23.73,24.44) 24.16,24.87 24.16,28.84 J1.6
TMS: length 14.7
  TOP w0.203: U1.46 37.42,34.47 36.33,35.55 33.83,35.55 32.51,36.88 31.18,36.88 30.16,37.9 R2.1 26.44,37.9 J1.3
UP: length 42.1
  TOP w0.203: R9.2 78.66,30.96 78.64,30.95 R10.1 74.82,29.78 67.4,22.36 52.68,22.36 47.44,27.6 U1.62
USB+: length 32.8
  TOP w0.203: R22.2 20.21,57.68 20.64,58.11 21.04,58.11 34.61,44.54 34.61,38.53 38.18,34.97 U1.45
USB-: length 32.8
  TOP w0.203: U1.44 38.19,35.47 34.97,38.69 34.97,44.69 21.19,58.47 20.26,58.47 19.7,59.03 R20.2
N01892: length 3.4
  TOP w0.203: R7.2 42.91,45.6 42.94,45.58 U1.28
N01962: length 3.8
  TOP w0.203: U1.60 46.44,28.8 46.19,28.55 R6.1
N02254: length 3.6
  TOP w0.203: R21.1 61.12,33.9 60.26,33.04 Y1.8
N03112: length 13.2
  TOP w0.203: J8.2 16.35,64.96 15.92,65.4 15.56,65.4 15.36,65.2 15.36,59.92 16.96,58.32 17.69,58.32 17.92,58.55 R20.1 17.92,59.95 17.93,59.96 R18.2 17.93,61.31 17.9,61.34 D3.2
N03116: length 14.2
  TOP w0.203: J8.3 15,65.55 15,59.77 17.09,57.68 R22.1 17.95,57.2 17.94,57.2 R17.2 D2.2
N07244: length 12.8
  TOP w0.203: J9.1 32.37,57.53 32.43,57.46 R24.1
N07286: length 13.3
  TOP w0.203: J9.3 40.17,68.23 41.08,67.32 R27.1
N09335: length 13.1
  TOP w0.203: R26.1 50.36,56.87 51.04,57.55 J10.1
N09345: length 13
  TOP w0.203: J10.3 58.84,68.23 58.77,68.16 R29.1
N10158: length 14.2
  TOP w0.203: J11.1 66.96,66.85 R33.1
N10168: length 13.7
  TOP w0.203: J11.3 75.6,67.7 R36.1
N10591: length 9.9
  TOP w0.203: R35.1 44.17,7.02 43.93,6.78 J12.1
N10601: length 10.1
  TOP w0.203: J12.3 36.13,6.78 35.47,7.44 R37.1
N10711: length 10
  TOP w0.203: R44.1 80.7,7.35 81.27,6.78 J14.1
N10721: length 10.8
  TOP w0.203: R45.1 72.11,6.77 J14.3
N10838: length 9.9
  TOP w0.203: J13.1 62.6,6.78 62.72,6.91 R42.1
N10848: length 10
  TOP w0.203: R43.1 54.02,7.56 54.8,6.78 J13.3
N15526: length 14.6
  TOP w0.203: R9.1 84.22,31.44 J5.4 J5.3
N15732: length 13.9
  TOP w0.203: R14.1 85.12,24.54 85.48,24.17 J6.3 J6.4
N16389: length 13.8
  TOP w0.203: R8.1 85.36,41.83 85.48,41.95 J4.4 J4.3
N16471: length 16.1
  TOP w0.203: J7.3 J7.4 81.08,49.32 80.89,49.32 80.43,48.87 R13.1
N018780: length 20.6
  TOP w0.203: U1.2 48.25,33.97 v1(47.69,34.53) ; R12.1 32.77,33.44 33.15,33.05 v1(33.76,33.05)
  BOTTOM w0.203: v1(47.69,34.53) 41.48,34.53 40.61,35.4 35.49,35.4 33.76,33.66 v1(33.76,33.05)
N021801: length 2.8
  TOP w0.203: U3.2 70.72,37.46 70.61,37.35 R23.2
N069480: length 3.1
  TOP w0.203: R25.2 35.64,56.82 36.74,55.72 Q1.1
N074280: length 2.6
  TOP w0.203: Q3.1 44.7,55.67 44.12,56.25 44.02,56.25 43.63,56.64 R30.2
N092570: length 2.8
  TOP w0.203: R28.2 53,56.71 53.47,56.25 53.57,56.25 54.15,55.67 Q2.1
N093950: length 2.7
  TOP w0.203: R31.2 61.4,56.67 61.83,56.25 61.93,56.25 62.51,55.67 Q4.1
N095300: length 3
  TOP w0.203: R32.2 70.1,56.56 70.47,56.19 70.57,56.19 71.15,55.61 Q5.1
N095980: length 2.8
  TOP w0.203: Q8.1 79.57,55.67 78.99,56.25 78.89,56.25 78.4,56.73 R39.2
N097490: length 2.2
  TOP w0.203: R34.2 38.86,15.3 39.4,15.83 Q6.1
N099610: length 2.3
  TOP w0.203: Q7.1 30.81,15.72 30.28,15.18 R38.2
N100350: length 2.7
  TOP w0.203: R41.2 75.85,15.64 75.98,15.77 Q10.1
N103300: length 2.6
  TOP w0.203: Q12.1 67.45,15.77 67.09,15.41 R47.2
N104020: length 2.5
  TOP w0.203: Q9.1 57.49,15.72 56.96,15.18 R40.2
N104740: length 2.4
  TOP w0.203: Q11.1 48.61,15.83 48.08,15.3 R46.2

## Copper pours and planes (outline as drawn; the poured copper is in the pictures)
GND on TOP: 0.72,72.96 0.72,1.96 2.31,0.37 92.46,0.37 94.12,2.04 94.12,73.79 93.74,74.17 1.93,74.17 ; 17 cut-outs
GND on BOTTOM: 0.72,72.96 0.72,1.96 2.31,0.37 92.46,0.37 94.12,2.04 94.12,73.79 93.74,74.17 1.93,74.17 ; 15 cut-outs

## Text on the board
Ref Des/Silkscreen Top: JRST | TDI | TMS | TCK | RTCK | TDO | RST | V | G | SW | LEFT | RIGHT | DOWN | UP
